# Altium PCB PCB1.PcbDoc
Units mil, origin at the board's own origin, x right, y up, seen from the top; angles counter-clockwise.
Board outline 3550 x 2100 mil, 2 copper layers (Top Layer, Bottom Layer); 81 components, 55 nets, 241 pads, 72 vias.
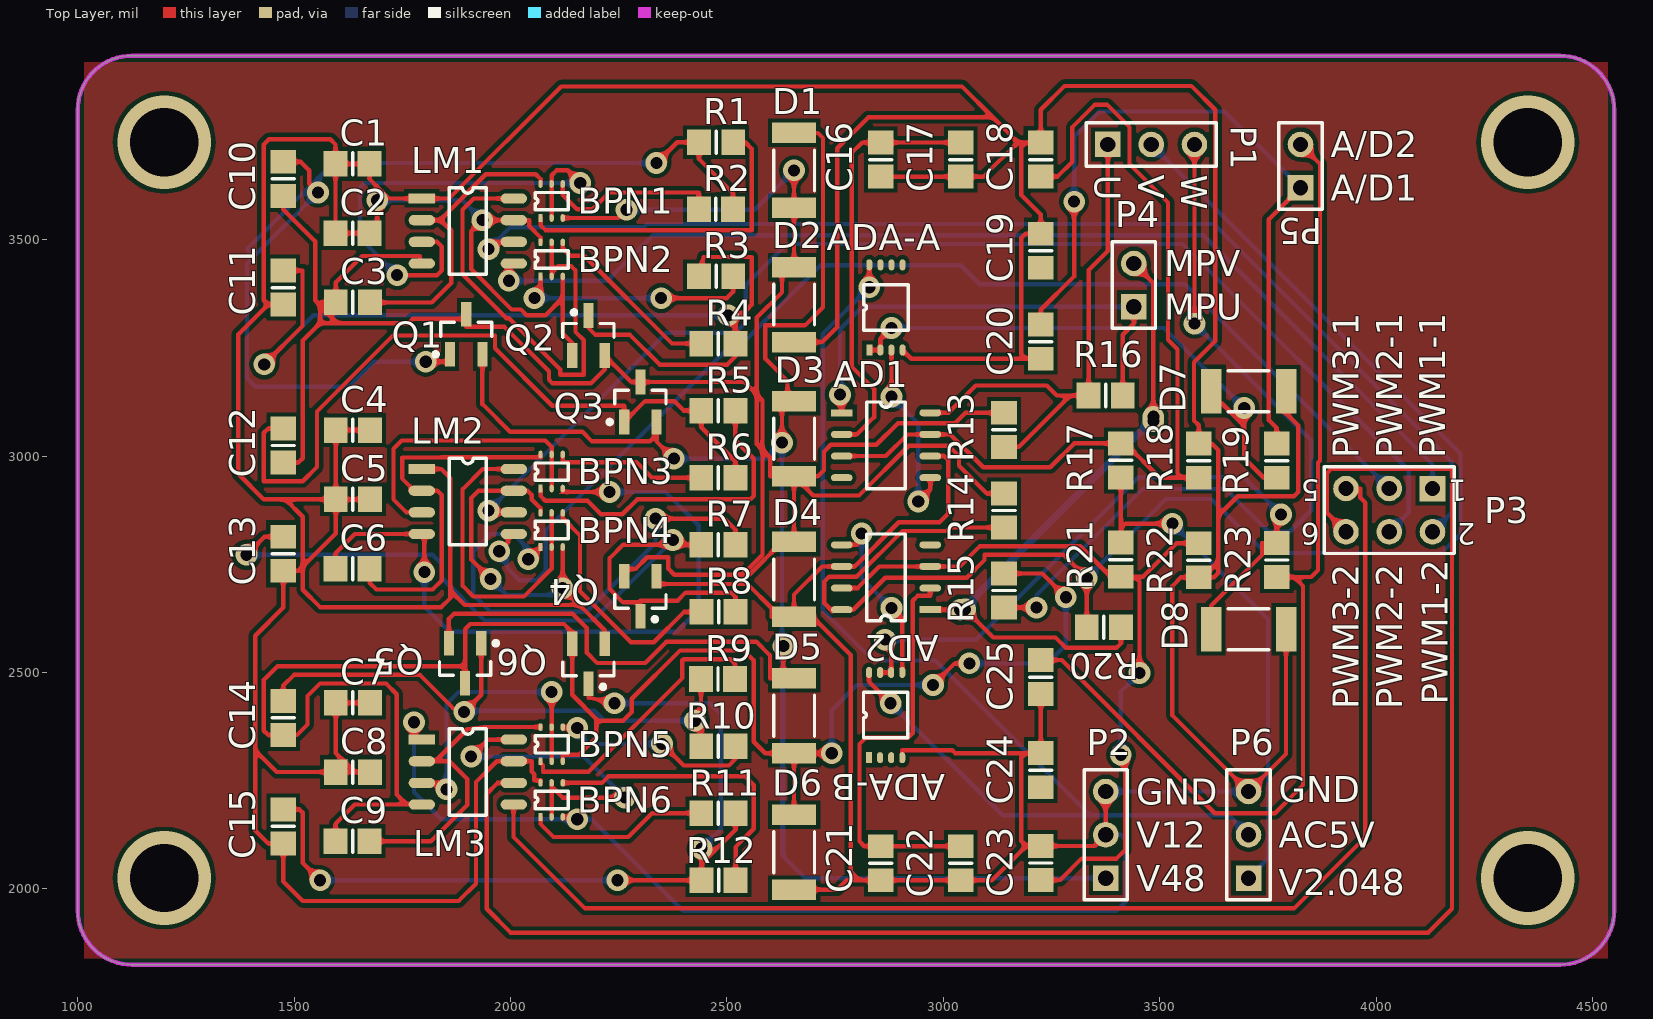
[diagram p0: Top Layer view]
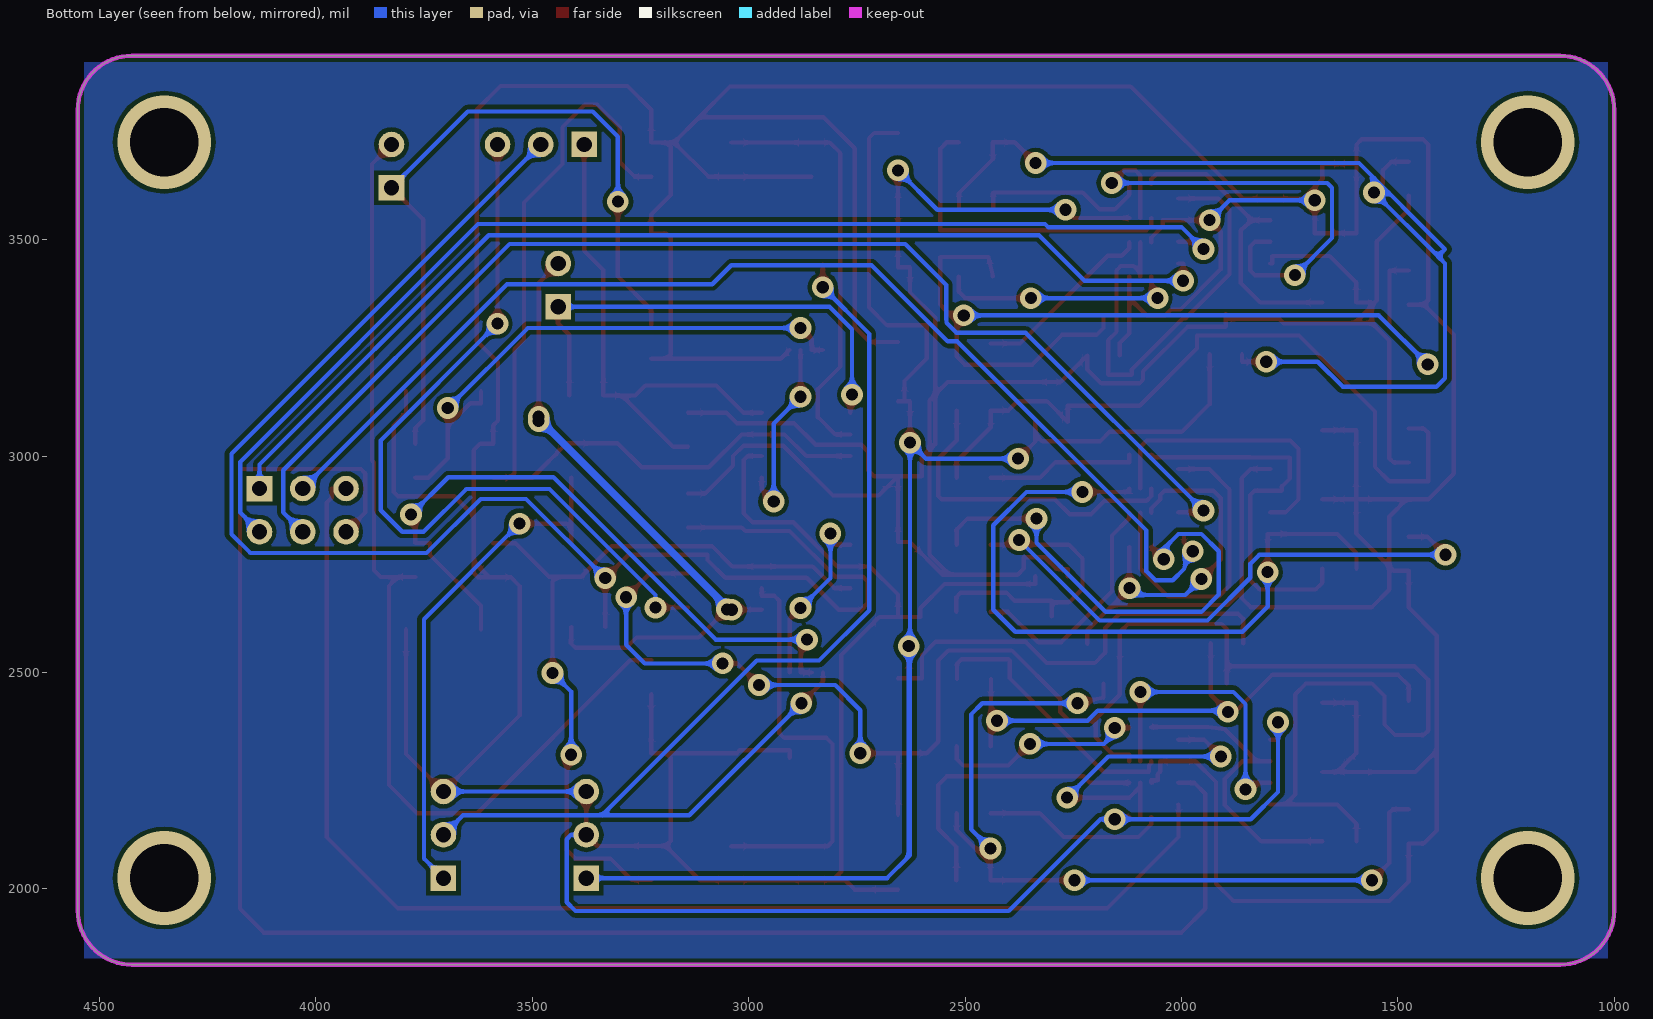
[diagram p1: Bottom Layer view, seen from below]

## Layer stack, top to bottom
Top Solder: solder mask 0.4, Solder Resist, Dk 3.5
Top Layer: signal copper 1.4
Dielectric 1: dielectric 12.6, FR-4, Dk 4.8
Bottom Layer: signal copper 1.4
Bottom Solder: solder mask 0.4, Solder Resist, Dk 3.5

## Board outline
1000,1950 1000,3800 cw(c1125,3800) 1125,3925 4425,3925 cw(c4425,3800) 4550,3800 4550,1950 cw(c4425,1950) 4425,1825 1125,1825 cw(c1125,1950)

## Design rules (kind name [scope] priority, off if disabled: settings)
Clearance [All] p1: gap=10
PolygonConnect [All] p1: connectstyle=Relief reliefconductorwidth=10 reliefentries=4 polygonreliefangle="90 Angle" airgapwidth=10
RoutingVias [All] p1: holewidth=28 width=50 viastyle="Through Hole" minholewidth=28 minwidth=50 maxholewidth=28 maxwidth=50
SolderMaskExpansion [All] p1: expansion=4
Width [All] p1: maxlimit=10 minlimit=10 preferedwidth=10
30 further rules are at their usual default settings.

## Classes and differential pairs
component class Sheet1: BC? BPN1 BPN2 BPN3 BPN4 BPN5 BPN6 C1 C2 C3 C4 C5 C6 C7 C8 C9 C10 C11 C12 C13 C14 C15 D1 D2 D3 D4 D5 D6 LM1 LM2 LM3 LM? P1 P2 P3 Q1 Q2 Q3 Q4 Q5 Q6 R1 R2 R3 R4 R5 R6 R7 R8 R9 R10 R11 R12 R13 R14 R15
component class Sheet2: AD1 AD2 ADA-A ADA-B C16 C17 C18 C19 C20 C21 C22 C23 C24 C25 D7 D8 P4 P5 P6 R16 R17 R18 R19 R20 R21 R22 R23

## Components (designator, comment, footprint, x,y, rotation, side; value= is the part's Value field where it differs from the comment)
AD1 "AD8210" AD8210 2765,3100 r0 top
AD2 "AD8210" AD8210 2969.72,2645 r180 top
ADA-A "Component_1" ADA4096 2828.82,3245 r90 top (schematic designator ADA-)
ADA-B "ADA-B" ADA4096 2828.23,2303.15 r90 top
BPN1 "BPN1" BC847BPN 2069.41,3550 r90 top
BPN2 "BPN2" BC847BPN 2069.41,3415 r90 top
BPN3 "BPN3" BC847BPN 2069.41,2925 r90 top
BPN4 "BPN4" BC847BPN 2069.41,2790 r90 top
BPN5 "BPN5" BC847BPN 2069.41,2295 r90 top
BPN6 "BPN6" BC847BPN 2069.41,2166.26 r90 top
C1 "Cap" 6-0805_M 1635,3675 r0 top
C2 "Cap" 6-0805_M 1635,3515 r0 top
C3 "Cap" 6-0805_M 1635.63,3355 r0 top
C4 "Cap" 6-0805_M 1635.63,3060 r0 top
C5 "Cap" 6-0805_M 1635.63,2900 r0 top
C6 "Cap" 6-0805_M 1635,2740 r0 top
C7 "Cap" 6-0805_M 1635.63,2430 r0 top
C8 "Cap" 6-0805_M 1635.63,2270 r0 top
C9 "Cap" 6-0805_M 1635,2110 r0 top
C10 "Cap" 6-0805_M 1475,3640.63 r90 top
C11 "Cap" 6-0805_M 1475,3389.37 r90 top
C12 "Cap" 6-0805_M 1475,3024.37 r90 top
C13 "Cap" 6-0805_M 1475,2774.37 r90 top
C14 "Cap" 6-0805_M 1475,2395 r90 top
C15 "Cap" 6-0805_M 1475,2144.37 r90 top
C16 "Cap" 6-0805_M 2855,3685 r90 top
C17 "Cap" 6-0805_M 3040,3685 r90 top
C18 "Cap" 6-0805_M 3225,3685 r90 top
C19 "Cap" 6-0805_M 3225,3474.37 r90 top
C20 "Cap" 6-0805_M 3225,3264.37 r90 top
C21 "Cap" 6-0805_M 2855,2059.37 r90 top
C22 "Cap" 6-0805_M 3040,2059.37 r90 top
C23 "Cap" 6-0805_M 3225,2060 r90 top
C24 "Cap" 6-0805_M 3225,2274.37 r90 top
C25 "Cap" 6-0805_M 3225,2489.37 r90 top
D1 "Diode 1N914" 12Z-2010 2655,3660 r90 top
D2 "Diode 1N914" 12Z-2010 2655,3350 r90 top
D3 "Diode 1N914" 12Z-2010 2655,3040 r90 top
D4 "Diode 1N914" 12Z-2010 2655,2715 r90 top
D5 "Diode 1N914" 12Z-2010 2655,2400 r90 top
D6 "Diode 1N914" 12Z-2010 2655,2085 r90 top
D7 "D Zener" 12Z-2010 3705,3150 r180 top
D8 "D Zener" 12Z-2010 3705,2600 r180 top
LM1 "LM1" LM5101A 1795,3595 r0 top
LM2 "LM2" LM5101A 1795,2970 r0 top
LM3 "LM3" LM5101A 1795,2345 r0 top
P1 "Header 3" HDR1X3 3380,3720 r0 top
P2 "Header 3" HDR1X3 3375,2025 r90 top
P3 "Header 3X2" HDR2X3 4130,2925 r180 top
P4 "Header 2" HDR1X2 3440,3345 r90 top
P5 "Header 2" HDR1X2 3825,3620 r90 top
P6 "Header 3" HDR1X3 3705,2025 r90 top
Q1 "NMOS-2" SOT-23_M 1897.6,3281.26 r90 top
Q2 "NMOS-2" SOT23_M 2180,3278.74 r90 top
Q3 "NMOS-2" SOT-23_M 2300,3125 r90 top
Q4 "NMOS-2" SOT23_M 2300,2676.26 r270 top
Q5 "NMOS-2" SOT-23_M 1895,2521.26 r270 top
Q6 "NMOS-2" SOT23_M 2180,2520 r270 top
R1 "Res1" 6-0805_M 2475,3725 r0 top
R2 "Res1" 6-0805_M 2474.37,3570 r0 top
R3 "Res1" 6-0805_M 2475,3415 r0 top
R4 "Res1" 6-0805_M 2480,3260 r0 top
R5 "Res1" 6-0805_M 2480,3105 r0 top
R6 "Res1" 6-0805_M 2480,2950 r0 top
R7 "Res1" 6-0805_M 2480,2795 r0 top
R8 "Res1" 6-0805_M 2480.63,2640 r0 top
R9 "Res1" 6-0805_M 2479.37,2485 r0 top
R10 "Res1" 6-0805_M 2480,2330 r180 top
R11 "Res1" 6-0805_M 2480,2175 r180 top
R12 "Res1" 6-0805_M 2480.63,2020 r180 top
R13 "Res1" 6-0805_M 3140,3060.63 r90 top
R14 "Res1" 6-0805_M 3140,2874.37 r90 top
R15 "Res1" 6-0805_M 3140,2689.37 r90 top
R16 "Res1" 6-0805_M 3375,3140 r0 top
R17 "Res1" 6-0805_M 3410,2990 r90 top
R18 "Res1" 6-0805_M 3590,2989.37 r90 top
R19 "Res1" 6-0805_M 3770,2989.37 r90 top
R20 "Res1" 6-0805_M 3370.63,2605 r0 top
R21 "Res1" 6-0805_M 3410,2760.63 r270 top
R22 "Res1" 6-0805_M 3590,2759.37 r270 top
R23 "Res1" 6-0805_M 3770,2760 r270 top

## Footprints (in the part's own frame and the unit in brackets; to place one, negate y for a bottom-side part, rotate by r counter-clockwise, add the part's x,y. Pads: shape width x height; smd on the part's side, far side on the other; paste and mask are expansions set on the pad)
6-0805_M [mm] "Chip Resistor, Body 2.0x1.2mm, IPC Low Density"
  rect 1.4x1.5 smd: 1(-1,0) 2(1,0)
  silkscreen extent 0,-0.65 0,0.65, body extent -1.07,-0.7 1.07,0.7, height 0.7
12Z-2010 [mm] "Chip Resistor, Body 5.0x2.5mm, IPC High Density"
  rect 1.2x2.6 smd: 1(-2.2,0) 2(2.2,0)
  silkscreen extent -1.2,-1.2 1.2,1.2, body extent -2.58,-1.33 2.58,1.33, height 0.9
AD8210 [mm]
  rect 1.27x0.41 smd: 1(0,0)
  oval 1.27x0.41 smd: 2(0,-1.27) 3(0,-2.54) 4(0,-3.81) 5(5.2,-3.81) 6(5.2,-2.54) 7(5.2,-1.27) 8(5.2,0)
  silkscreen extent 1.47,-4.44 3.73,0.64
ADA4096 [mm]
  rect 0.65x0.35 smd: 1(0,0)
  oval 0.65x0.35 smd: 2(0,-0.65) 3(0,-1.3) 4(0,-1.95) 5(5,-1.95) 6(5,-1.3) 7(5,-0.65) 8(5,0)
  silkscreen extent 1.16,-2.28 3.84,0.33
BC847BPN [mm]
  rect 0.45x0.25 smd: 1(0,0)
  oval 0.45x0.25 smd: 2(0,-0.65) 3(0,-1.3) 4(2,-1.3) 5(2,-0.65) 6(2,0)
  silkscreen extent 0.48,-1.63 1.5,0.33
HDR1X2 [mm] "Connector; Header; 2 Position"
  rect 1.5x1.5 hole 0.9: 1(0,0)
  round 1.5 hole 0.9: 2(2.54,0)
  silkscreen extent -1.27,-1.27 3.81,1.27
HDR1X3 [mm] "Connector; Header; 3 Position"
  rect 1.5x1.5 hole 0.9: 1(0,0)
  round 1.5 hole 0.9: 2(2.54,0) 3(5.08,0)
  silkscreen extent -1.27,-1.27 6.35,1.27
HDR2X3 [mm] "Connector; Header; 3x2 Position"
  rect 1.5x1.5 hole 0.9: 1(0,0)
  round 1.5 hole 0.9: 2(0,2.54) 3(2.54,0) 4(2.54,2.54) 5(5.08,0) 6(5.08,2.54)
  silkscreen extent -1.27,-1.27 6.35,3.81
LM5101A [mm]
  rect 1.55x0.6 smd: 1(0,0)
  oval 1.55x0.6 smd: 2(0,-1.27) 3(0,-2.54) 4(0,-3.81) 5(5.4,-3.81) 6(5.4,-2.54) 7(5.4,-1.27) 8(5.4,0)
  silkscreen extent 1.61,-4.44 3.79,0.64
SOT23_M [mm] "SOT23, 3-Leads, Body 2.9x1.3mm, Pitch 0.95mm, Lead Span 2.3mm - Reverse Pinning, IPC Low Density"
  rect 1.45x0.6 smd: 1(1.175,0) 2(-1.175,-0.95) 3(-1.175,0.95)
  silkscreen extent -0.1,-1.5 1.47,1.5, body extent -0.7,-1.5 0.7,1.5, height 1.1
SOT-23_M [mm] "SOT23, 3-Leads, Body 2.9x1.3mm, Pitch 0.95mm, Lead Span 2.5mm, IPC Low Density"
  rect 1.45x0.6 smd: 1(-1.175,0.95) 2(-1.175,-0.95) 3(1.175,0)
  silkscreen extent -1.3,-1.5 0.7,1.92, body extent -0.7,-1.5 0.7,1.5, height 1.1

## Part data
AD1 AD2 ADA-B: library part Component_1
BPN1 BPN2 BPN3 BPN4 BPN5 BPN6: library part BC847BPN
C1 C2 C3 C4 C5 C6 C7 C8 C9 C10 C11 C12 C13 C14 C15 C16 C17 C18 C19 C20 C21 C22 C23 C24 C25: "Capacitor"
D1 D2 D3 D4 D5 D6: "High Conductance Fast Diode"
D7 D8: "Zener Diode"
LM1 LM2 LM3: library part LM5101A
P1 P2 P6: "Header, 3-Pin"
P3: "Header, 3-Pin, Dual row"
P4 P5: "Header, 2-Pin"
Q1 Q2 Q3 Q4 Q5 Q6: "N-Channel Power MOSFET"
R1 R2 R3 R4 R5 R6 R7 R8 R9 R10 R11 R12 R13 R14 R15 R16 R17 R18 R19 R20 R21 R22 R23: "Resistor"

## Via types
v1: diameter 50, hole 28, Top Layer to Bottom Layer, 68 vias
v2: diameter 216.54, hole 157.48, Top Layer to Bottom Layer, 4 vias

## Nets (pads, with @x,y where several pads share a name; then routed paths per layer and width w, separated by ;. In a path a pad name is that pad's centre, name@x,y a point inside that pad or via, vN(x,y) a via of type N, cw(c..) or ccw(c..) an arc to the next point about the centre after c; other vN are vias at no path point)
A/D1: C20.2 P5.1 R19.2 | length 1715
  Top Layer w10: C20.2 3225,3338 3302,3415 v1(3302,3588) ; R19.2 3770,3065 3752,3083 3752,3547 P5.1
  Bottom Layer w10: v1(3302,3588) 3302,3738 3360,3796 3649,3796 P5.1
A/D2: C25.2 P5.2 R23.2 | length 2374.9
  Top Layer w10: C25.2 3273.26,2528.74 3627,2175 3766,2175 3831,2240 3831,2700 3810.37,2720.63 ; R23.2 3810.37,2720.63 ; P5.2 3870,3675 3870,2989.53 3865.47,2985 3865.47,2736.1 3850,2720.63 3810.37,2720.63
ACV5: ADA-A.8 ADA-B.8 P6.2 | length 2701.1
  Top Layer w10: ADA-B.8 2828.23,2478.77 v1(2878,2429) ; v1(2828.82,3390) ADA-A.8
  Bottom Layer w10: v1(2828.82,3390) 2721,3282.18 2721,2644 2837.37,2527.63 2981.05,2527.63 3338.68,2170 ; v1(2878,2429) 3137,2170 3338.68,2170 ; P6.2 3660,2170 3338.68,2170
GND: AD1.6 AD2.6 ADA-A.4 ADA-B.4 BPN2.3 BPN2.6 BPN4.3 BPN4.6 BPN6.3 BPN6.6 C1.1 C1.2 C2.1 C2.2 C4.1 C4.2 C5.1 C5.2 C7.1 C7.2 C8.1 C8.2 C11.1 C13.1 C15.1 C16.1 C17.1 C18.2 C19.2 C20.1 C21.1 C22.1 C23.2 C24.2 C25.1 D2.1 D4.1 D6.1 D7.1 D8.1 LM1.1 LM1.7 LM2.1 LM2.7 LM3.1 LM3.7 P2.2 P2.3 P6.3 Q2.3 Q4.3 Q6.3 R18.2 R22.2 | length 20764.7
  Top Layer w10: C11.1 1440,3350 ; C8.2 1640,2270 ; C7.2 C7.1 1596.26,2313.74 1640,2270 ; C5.2 C5.1 ; C4.2 C4.1 C5.1 ; v1(1692,3591) 1692,3515 C2.2 C2.1 C1.1 ; v1(1777,2385) 1777,2345 LM3.1 ; LM2.1 1840,2970 1861,2949 1861,2688.79 ; v1(1954,2716) 1909,2761 1909,2903 1926,2920 LM2.7 2039,2920 2049,2910 2049,2899.71 2069.41,2879.3 BPN4.6 ; BPN6.6 2069.41,2251 2055,2251 2055,2265 2049,2271 2049,2295 LM3.7 1968,2295 1920,2247 1920,2012 1880,1972 1520,1972 1475,2017 C15.1 1440,2105 1410,2135 1410,2320 ; BPN2.6 2069.41,3505 2043,3531.41 2043,3545 LM1.7 v1(1935,3545) 1909,3519 1909,3432 2002.45,3338.55 2023.95,3338.55 2037.5,3325 2080,3325 2120.59,3365.59 ; BPN6.3 2148.74,2166.26 v1(2154,2161) ; BPN2.3 2120.59,3365.59 ; Q2.3 2142.6,3261.46 2120.59,3283.46 2120.59,3365.59 ; Q6.3 2217.4,2597.6 2159.21,2655.79 ; Q4.3 2337.4,2704.53 2547.47,2704.53 2603.61,2648.39 2603.61,2628.39 D4.1 ; D6.1 2755,1998.39 2776.61,2020 2806,2020 ; D2.1 2720,3263.39 2755,3298.39 2755,3711 2827,3783 3114,3783 ; C16.1 C17.1 3093,3645.63 3172.63,3724.37 ; ADA-B.4 2905,2320.2 3020.26,2320.2 3026.72,2313.74 3190,2313.74 ; ADA-A.4 2925.59,3225 3190,3225 ; AD1.6 3002,3000 3011.11,2990.89 3011.11,2867.19 2990.84,2846.93 2897.07,2846.93 2795.14,2745 AD2.6 2720,2745 2655,2680 D4.1 ; C25.1 C24.2 3190,2313.74 ; C20.1 3190,3225 ; P2.3 P2.2 3349.37,2099.37 C23.2 3191.37,2099.37 ; D8.1 3791.61,2311.61 P6.3 3529,2401 3529,2700 3549,2720 R22.2 R22.2@3599,2720 ; D7.1 3791.61,3099 3820,3070.61 3820,2917 3810,2907 3680,2907 3635,2862 ; 1410,2320 1410,2585 1475,2650 C13.1 1510,2735 1520,2745 ; 1410,2320 1460,2270 C8.1 1640,2270 ; 1440,3350 1371,3281 1371,2959 1430,2900 1480,2900 ; 1440,3350 1430,3360 1430,3720 1442,3732 1583.63,3732 1595.63,3720 C1.1 ; 1480,2900 C5.1 ; 1480,2900 1520,2860 1520,2745 ; 1520,2745 1520,2691 1560,2651 1840,2651 1861,2672 1861,2688.79 ; 1520,2745 1596.26,2821.26 C5.1 ; C1.1 C1.2 1674.37,3640 1719.37,3595 LM1.1 1858,3595 2117,3854 3043,3854 3114,3783 ; 1861,2688.79 1894,2655.79 2159.21,2655.79 ; v1(2120,2695) 2159.21,2655.79 ; v1(2120,2695) BPN4.3 2120.59,2695.59 v1(2120,2695) ; D4.1 2698,2628.39 2786,2540.39 2786,2040 2806,2020 ; 2806,2020 C21.1 C22.1 3112,2020 3191.37,2099.37 ; 3114,3783 3172.63,3724.37 ; 3172.63,3724.37 3190,3724.37 ; 3190,2313.74 3180,2303.74 3180,2110.74 3191.37,2099.37 ; 3190,3225 3180,3235 3180,3503.74 3190,3513.74 C19.2 3225,3558 3180,3603 3180,3714.37 3190,3724.37 ; 3190,3724.37 C18.2 3225,3800 3280,3855 3573,3855 3628,3800 3628,3266 3579,3217 3579,3082 3590,3071 R18.2 3620,3028.74 3635,3013.74 3635,2862 ; R22.2@3599,2720 3625,2720 3635,2730 3635,2756 ; R22.2@3599,2720 3635,2756 ; 3635,2756 3635,2862
  Bottom Layer w10: v1(1692,3591) 1889,3591 v1(1935,3545) ; v1(1777,2385) 1777,2224 1840,2161 v1(2154,2161) 2187,2161 2399,1949 3400,1949 3420,1969 3420,2115 3410,2125 P2.2 ; v1(1954,2716) 1991,2679 2104,2679 v1(2120,2695) ; P2.3 P6.3
HB1: BPN1.6 C3.2 LM1.2 | length 697.7
  Top Layer w10: C3.2 1818,3355 1863,3400 1863,3522 1836.71,3545 ; LM1.2 1836.71,3545 ; BPN1.6 2069.41,3640 2058.41,3651 1942.71,3651 1836.71,3545
HB2: BPN3.6 C6.2 LM2.2 | length 899.8
  Top Layer w10: C6.2 1674.37,2707.49 1690,2691.86 1820,2691.86 1841,2712.86 1841,2910 1831,2920 LM2.2 1768,2920 1768,2930 1749.49,2948.51 1749.49,2996.81 1840.32,2996.81 1840.51,2997 2069.41,2997 BPN3.6
HB3: BPN5.6 C9.2 LM3.2 | length 717.1
  Top Layer w10: C9.2 1816,2110 1900,2194 1900,2254.06 1859.06,2295 1826,2295 ; LM3.2 1826,2295 ; BPN5.6 2069.41,2374 1938,2374 1900,2369 1826,2295
HI1: LM1.5 P3.1 | length 2504
  Top Layer w10: v1(1996,3405) 1996,3445 LM1.5
  Bottom Layer w10: v1(1996,3405) 2224,3405 2329,3510 3600.56,3510 4130,2980.56 P3.1
HI2: LM2.5 P3.3 | length 2730.9
  Top Layer w10: v1(1974,2780) 1994,2800 1994,2820 LM2.5
  Bottom Layer w10: v1(1974,2780) 1984,2780 1994,2739.14 2020,2713.14 2060,2713.14 2081,2734.14 2081,2828 2518,3265 2540,3265 2716,3441 3040,3441 3084,3397 3558,3397 P3.3
HI3: LM3.5 P3.5 | length 3023.3
  Top Layer w10: LM3.5 2007,2195 2007,2120 2172,1955 3810,1955 3975,2120 3975,2892 3963,2904 3963,2925 P3.5
HO1: BPN1.2 BPN1.5 LM1.3 | length 1145.9
  Top Layer w10: v1(1738,3418) 1830,3418 1841,3429 1841,3484 1830,3495 LM1.3 ; BPN1.2 BPN1.5 2095,3649 2106,3660 2132,3660 v1(2161,3631)
  Bottom Layer w10: v1(1738,3418) 1652,3504 1652,3620 1663,3631 v1(2161,3631)
HO2: BPN3.2 BPN3.5 LM2.3 | length 670.4
  Top Layer w10: LM2.3 1759.49,2870 1729.49,2900 1729.49,3016.81 1748.68,3036 2080,3036 2095,3021 BPN3.5 BPN3.2
HO3: BPN5.2 BPN5.5 LM3.3 | length 674.8
  Top Layer w10: LM3.3 1837,2245 v1(1852,2230) ; BPN5.2 BPN5.5 v1(2095,2455)
  Bottom Layer w10: v1(1852,2230) 1852,2427 1880,2455 v1(2095,2455)
HS1: BPN1.3 C3.1 C10.1 C12.1 D1.1 D2.2 D3.1 D4.2 LM1.4 Q1.3 Q2.2 Q3.3 Q4.2 R13.2 R14.2 | length 5948
  Top Layer w10: C12.1 1510,2985 1520,2995 1520,3267 1560,3307 ; C10.1 1475,3570.02 1549,3496.02 1549,3360 1560,3348.34 ; LM1.4 1790.31,3445 1790.31,3462.41 1657.41,3462.41 1596.26,3401.26 C3.1 1560,3355 1560,3348.34 ; Q1.3 Q1.3@1897.6,3317 ; BPN1.3 2249,3550 v1(2268,3569) ; Q4.2 2262.6,2739 2289,2739 2316.06,2766.06 2364.21,2766.06 2364.21,2740 2378.21,2726 2536,2726 ; v1(2655,3660) D1.1 D2.2 2627,3436.61 2627,3378.18 2568.82,3320 2568.82,3142.18 ; R14.2 3100,2913.74 3036,2977.74 3036,3000 3012,3024 2920,3024 2805,2909 2699.39,2909 D3.1 ; R13.2 3051,3100 3027,3076 2895,3076 2845,3026 2740,3026 2724,3010 2724,2967.39 2710,2953.39 D3.1 ; 1560,3307 1560,3348.34 ; 1560,3307 1599,3307 ; 1560,3348.34 1573.75,3333.76 1599,3307 ; 1599,3307 1764,3307 1774,3317 Q1.3@1897.6,3317 ; Q1.3@1897.6,3317 1897.6,3298.55 1986.08,3298.55 2088.75,3195.88 2088.75,3176.25 2097,3168 2185.4,3168 2217.4,3200 Q2.2 2278.62,3171.26 Q3.3 2300,3171 2540,3171 2568.82,3142.18 ; 2536,2726 2551.39,2726 2627,2801.61 D4.2 D3.1 ; 2536,2726 2581.93,2771.93 2581.93,3014.53 ; 2568.82,3142.18 2581.93,3129.07 2581.93,3014.53 ; 2568.82,3142.18 2568.82,3027.64 2581.93,3014.53 ; 2581.93,3014.53 2600,2996.46 2600,2953.39 D3.1
  Bottom Layer w10: v1(2268,3569) 2564,3569 v1(2655,3660)
HS2: BPN3.3 C6.1 LM2.4 | length 1655.8
  Top Layer w10: C6.1 1595.63,2775.63 1640,2820 LM2.4 1801,2820 v1(1801,2732) ; BPN3.3 2120.59,2917 v1(2229,2917)
  Bottom Layer w10: v1(1801,2732) 1801,2652 1859,2594 2384,2594 2435,2645 2435,2840 2358,2917 v1(2229,2917)
HS3: BPN5.3 C9.1 C14.1 D5.1 D6.2 LM3.4 Q5.3 Q6.2 R15.2 | length 4245.9
  Top Layer w10: C9.1 1595.63,2150.63 1640,2195 1760,2195 ; LM3.4 1760,2195 ; Q5.3 1895,2514.53 ; BPN5.3 2120.59,2310 2158.12,2310 2198.2,2350.08 2198.2,2388.65 ; D6.2 D5.1 ; v1(2742,2313.39) D5.1 ; v1(2976,2471) 3026,2521 v1(3060,2521) ; R15.2 3228.26,2728.74 v1(3283,2674) ; 1760,2195 1737,2218 1737,2450 1712.47,2474.53 1560,2474.53 1531,2445.53 1531,2380 1506.63,2355.63 C14.1 1440,2355.63 1430,2365.63 1430,2483 1461.53,2514.53 1895,2514.53 ; 1895,2514.53 1895,2600 1907,2612 2123.33,2612 2142.6,2592.73 Q6.2 2142.6,2448.4 2198.2,2392.8 2198.2,2388.65 ; 2198.2,2388.65 2260,2388.65 2280,2408.65 2280,2439.29 2391.71,2551 2539,2551 2562,2528 2562,2340 2588.61,2313.39 D5.1
  Bottom Layer w10: v1(2742,2313.39) 2742,2413 2800,2471 v1(2976,2471) ; v1(3060,2521) 3240,2521 3283,2564 v1(3283,2674)
LI1: LM1.6 P3.2 | length 2722.7
  Top Layer w10: v1(1949,3478) 1966,3495 LM1.6
  Bottom Layer w10: v1(1949,3478) 2000,3529 2308.08,3529 2315.08,3536 3625,3536 4174.53,2986.47 4174.53,2869.53 P3.2
LI2: LM2.6 P3.4 | length 2869.8
  Top Layer w10: v1(1949,2874) 1953,2870 LM2.6
  Bottom Layer w10: v1(1949,2874) 2360,3285 2520,3285 2542.88,3307.88 2542.88,3314.89 2543.31,3315.32 2543.31,3395.31 2638,3490 3552.22,3490 4075,2967.22 4075,2870 P3.4
LI3: LM3.6 P3.6 | length 4077.6
  Top Layer w10: LM3.6 1970,2245 1945,2220 1945,1954 2000,1899 4120,1899 4175,1954 4175,2970 3895.47,2970 3885.47,2960 3885.47,2869.53 P3.6
LO1: BPN2.2 BPN2.5 LM1.8 | length 1055
  Top Layer w10: LM1.8 1915,3595 1889,3569 1889,3420 1990.45,3318.55 1996.45,3318.55 2115,3200 2115,3188 2169.41,3188 2169.41,3267.59 2150,3287 2150,3429 2140,3439 2110,3439 2095,3424 ; BPN2.2 2095,3424 ; BPN2.5 2095,3424
LO2: BPN4.2 BPN4.5 LM2.8 | length 732
  Top Layer w10: LM2.8 1936,2970 1889,2923 1889,2700.79 1914,2675.79 2030.79,2675.79 2095,2740 BPN4.2 BPN4.5
LO3: BPN6.2 BPN6.5 LM3.8 | length 767.2
  Top Layer w10: v1(1909,2306) 1948,2345 LM3.8 ; BPN6.2 2095,2236 ; BPN6.5 2095,2236 ; v1(2264,2211) 2120,2211 2095,2236
  Bottom Layer w10: v1(1909,2306) 2169,2306 v1(2264,2211)
MPU: AD1.1 P4.1 R16.2 | length 1110.8
  Top Layer w10: v1(2761,3142) 2765,3138 AD1.1 ; R16.2 3414.37,3280.47 3440,3306.1 P4.1
  Bottom Layer w10: v1(2761,3142) 2761,3293 2813,3345 P4.1
MPV: AD2.1 P4.2 R20.2 | length 2136.8
  Top Layer w10: AD2.1 v1(3039,2645) ; v1(3050,2646) 3115,2581 3259,2581 3283,2557 3400,2557 3410,2567 R20.2 ; P4.2 3485,3400 v1(3485,3091) v1(3485,3081)
  Bottom Layer w10: v1(3039,2645) v1(3485,3091) ; v1(3050,2646) v1(3485,3081)
NetAD1_2: AD1.2 C16.2 C17.2 | length 985.2
  Top Layer w10: AD1.2 2800,3050 2840,3090 2840,3155 2788,3207 2788,3700 2812.37,3724.37 C16.2 C17.2
NetAD1_3: AD1.3 AD1.7 C18.1 R17.2 R18.1 | length 2135.4
  Top Layer w10: AD1.3 2867,3000 2917,3050 AD1.7 3016,3050 3092,2974 3247,2974 3302.37,3029.37 R17.2 3420.63,3029.37 3500,2950 3551,2950 ; C18.1 3263.63,3645.63 3298,3680 3298,3760 3350,3812 3378,3812 3430,3760 3430,3675 3519,3586 3519,3269 3541,3247 3541,2960 3551,2950 ; R18.1 3551,2950
NetAD1_5: AD1.5 ADA-A.3 | length 442.6
  Top Layer w10: v1(2880,3137) ADA-A.3 ; v1(2942,2895) 2970,2923 2970,2950 AD1.5
  Bottom Layer w10: v1(2880,3137) 2942,3075 v1(2942,2895)
NetAD2_2: AD2.2 C21.2 C22.2 | length 966.3
  Top Layer w10: AD2.2 2969.72,2677 2940,2677 2929,2666 2929,2360 2918,2349 2820,2349 2806,2335 2806,2110 2817.26,2098.74 C21.2 C22.2
NetAD2_3: AD2.3 AD2.7 C23.1 R21.2 R22.1 | length 1808.2
  Top Layer w10: AD2.7 2801.87,2695 2851.87,2745 AD2.3 3037.74,2745 3084.74,2792 3316,2792 3386.74,2721.26 R21.2 3441.74,2721.26 ; C23.1 3270,2020.63 3319.37,2070 3400,2070 3420,2090 3420,2300 v1(3410,2310) ; v1(3453,2499) 3453,2710 3441.74,2721.26 ; R22.1 3538.48,2798.74 3461,2721.26 3441.74,2721.26
  Bottom Layer w10: v1(3410,2310) 3410,2456 v1(3453,2499)
NetAD2_5: AD2.5 ADA-B.5 | length 425.5
  Top Layer w10: AD2.5 2800,2795 2811,2806 v1(2811,2821) ; v1(2880,2649) 2905,2624 ADA-B.5
  Bottom Layer w10: v1(2811,2821) 2811,2718 v1(2880,2649)
NetADA-_1: ADA-A.1 ADA-A.2 D7.2 R19.1 | length 1314.5
  Top Layer w10: ADA-A.1 ADA-A.2 2854.41,3270.41 v1(2880,3296) ; D7.2 3618.39,3122 3643.19,3122 3695,3070.19 ; v1(3695,3111) 3695,3070.19 ; R19.1 3740,2950 3695,2995 3695,3070.19
  Bottom Layer w10: v1(2880,3296) 3510,3296 v1(3695,3111)
NetADA-B_6: ADA-B.6 ADA-B.7 D8.2 R23.1 | length 1565.4
  Top Layer w10: ADA-B.7 ADA-B.6 2879.41,2561.59 v1(2865,2576) ; D8.2 3618.39,2654 3736,2771.61 3736,2799.37 R23.1 3770,2855 v1(3780,2865)
  Bottom Layer w10: v1(2865,2576) 3076,2576 3451,2951 3694,2951 v1(3780,2865)
NetBPN1_1: BPN1.1 R1.2 | length 745.8
  Top Layer w10: BPN1.1 2069.41,3533.29 2080.7,3522 2557,3522 2557,3710 2542,3725 R1.2
NetBPN1_4: BPN1.4 R2.1 | length 408.8
  Top Layer w10: BPN1.4 2120.59,3603.41 2154,3570 2188.98,3570 2228,3609.02 2435,3609.02 R2.1
NetBPN2_1: BPN2.1 R3.2 | length 556.6
  Top Layer w10: v1(2055,3365) 2069.41,3379.41 BPN2.1 ; v1(2348,3365) 2499.37,3365 2514.37,3380 R3.2
  Bottom Layer w10: v1(2055,3365) v1(2348,3365)
NetBPN2_4: BPN2.4 R4.1 | length 424.9
  Top Layer w10: BPN2.4 2120.59,3480 2137.89,3462.7 2170.13,3462.7 2372.83,3260 R4.1
NetBPN3_1: BPN3.1 R5.2 | length 759.6
  Top Layer w10: BPN3.1 2069.41,2907.59 2080,2897 2177.7,2897 2209.15,2865.55 2258.15,2865.55 2292.6,2900 2554,2900 2561.93,2907.93 2561.93,2994.07 2519.37,3036.63 R5.2
NetBPN3_4: BPN3.4 R6.1 | length 352.7
  Top Layer w10: BPN3.4 2120.59,2986 2291,2986 2327,2950 R6.1
NetBPN4_1: BPN4.1 R7.2 | length 1112
  Top Layer w10: v1(2041,2761.59) BPN4.1 ; v1(2335,2855.56) 2494.44,2855.56 2519.37,2830.63 R7.2
  Bottom Layer w10: v1(2041,2761.59) 2041,2786 2007,2820 1954,2820 1914,2780 1914,2680 1954,2640 2175,2640 2335,2800 v1(2335,2855.56)
NetBPN4_4: BPN4.4 R8.1 | length 556.2
  Top Layer w10: BPN4.4 2120.59,2856.47 2160.49,2816.57 2160.49,2687.51 2278,2570 2330.73,2570 2400.73,2640 R8.1
NetBPN5_1: BPN5.1 R9.2 | length 641.1
  Top Layer w10: BPN5.1 2069.41,2291 2075,2285.41 2075,2271 2180.57,2271 2397,2487.43 2397,2528 2400,2531 2507.74,2531 2518.74,2520 R9.2
NetBPN5_4: BPN5.4 R10.1 | length 479.8
  Top Layer w10: BPN5.4 2120.59,2372 v1(2154,2372) ; v1(2350,2335) 2400,2285 2504.37,2285 2519.37,2300 R10.1
  Bottom Layer w10: v1(2154,2372) 2154,2360 2179,2335 v1(2350,2335)
NetBPN6_1: BPN6.1 R11.2 | length 422.7
  Top Layer w10: BPN6.1 2069.41,2150 2099.39,2120.02 2272.02,2120.02 2327,2175 R11.2
NetBPN6_4: BPN6.4 R12.1 | length 693.3
  Top Layer w10: BPN6.4 2211,2245 2226,2260 2542,2260 2562,2240 2562,2139 2520,2097 R12.1
NetC10_2: C10.2 Q1.1 R1.1 R2.2 | length 2500.6
  Top Layer w10: C10.2 1515,3680 1535,3660 1535,3629 v1(1555,3609) ; v1(1804,3218) 1860.2,3218 Q1.1 ; v1(2337,3677) 2385,3725 R1.1 2435.63,3686.11 2513.74,3608 R2.2
  Bottom Layer w10: v1(1555,3609) 1407.5,3461.5 ; v1(1804,3218) 1685,3218 1627,3160 1411,3160 1391,3180 1391,3445 1407.5,3461.5 ; v1(2337,3677) 1590,3677 1391,3478 1407.5,3461.5
NetC11_2: C11.2 Q2.1 R3.1 R4.2 | length 2253.4
  Top Layer w10: v1(1431,3212) 1519.53,3300.53 1519.53,3428.74 C11.2 ; Q2.1 2180,3296.02 2196.02,3280 2276,3280 2345,3211 2500.37,3211 2519.37,3230 R4.2 v1@2519.37,3308.63 ; R3.1 2445.63,3460 2557,3460 2557,3350 2520.11,3309.44 v1@2519.37,3308.63 ; v1(2503,3325) v1@2519.37,3308.63
  Bottom Layer w10: v1(1431,3212) 1544,3325 v1(2503,3325)
NetC12_2: C12.2 Q3.1 R5.1 R6.2 | length 1724.8
  Top Layer w10: C12.2 1440,3063.74 1430,3053.74 1430,2942 1520,2942 1553,2975 1553,3103 1728.55,3278.55 1963.95,3278.55 1963.95,3248.98 2096.52,3116.4 2262.6,3116.4 Q3.1 2310.86,3127 2378,3127 2400,3105 R5.1 2440.63,3066.74 2519.37,2988 R6.2
NetC13_2: C13.2 Q4.1 R7.1 R8.2 | length 1943.7
  Top Layer w10: v1(1390,2772) 1431.74,2813.74 C13.2 ; Q4.1 2300,2662 ; v1(2375,2806) v1@2386,2795 ; R7.1 v1@2386,2795 ; R8.2 2520,2674.53 2510,2684.53 2404.53,2684.53 2386,2666 2300,2666 2300,2662 ; 2300,2662 2260,2662 2228.7,2693.3 2228.7,2763.7 2260,2795 v1@2386,2795
  Bottom Layer w10: v1(1390,2772) 1820,2772 1841,2751 1841,2718.74 1939.74,2620 2189,2620 v1(2375,2806)
NetC14_2: C14.2 Q5.1 R9.1 R10.2 | length 1392
  Top Layer w10: C14.2 1475,2470 1499.53,2494.53 1790.47,2494.53 1868,2417 v1(1892.76,2409) 1932.4,2448.65 Q5.1 ; v1(2426,2388.65) v1@2440.63,2374.02 ; R9.1 2440,2407.63 2440.63,2407 v1@2440.63,2374.02 ; R10.2 v1@2440.63,2374.02
  Bottom Layer w10: v1(1892.76,2409) 1895.76,2412 2193.51,2412 2216.87,2388.65 v1(2426,2388.65)
NetC15_2: C15.2 Q6.1 R11.1 R12.2 | length 2002.7
  Top Layer w10: C15.2 1512.04,2183.74 1520,2175.78 1520,2060 v1(1560,2020) ; Q6.1 2180,2442 v1(2240,2429) ; v1(2247,2020) R12.2 2441.26,2058 ; v1(2441.26,2093.26) 2441.26,2058 ; R11.1 2519.37,2136.11 2441.26,2058
  Bottom Layer w10: v1(1560,2020) v1(2247,2020) ; v1(2240,2429) 2460,2429 2486,2403 2486,2138 v1(2441.26,2093.26)
U: AD1.8 P1.1 R13.1 R16.1 | length 1202.1
  Top Layer w10: AD1.8 3012,3100 3075,3163 3239,3163 3262,3140 3293,3140 ; R13.1 3174.26,3021.26 3293,3140 ; P1.1 3380,3474.37 3335.63,3430 R16.1 3293,3140
V: AD2.8 P1.2 R14.1 R20.1 | length 3529.6
  Top Layer w10: R14.1 3016.07,2835 3008,2826.93 2905.5,2826.93 2799.57,2721 2736,2721 2725,2710 2725,2660 2740,2645 AD2.8 2791.87,2645 2865.87,2719 3054,2719 3095,2760 3095,2772 3277.26,2772 v1(3331.26,2718) R20.1
  Bottom Layer w10: v1(3331.26,2718) 3514.26,2901 3619,2901 3744,2776 4151,2776 4194.53,2819.53 4194.53,3005.47 P1.2
V2.048: P6.1 R17.1 R21.1 | length 1203
  Top Layer w10: R21.1 3410,2834 ; R17.1 3410,2834 ; v1(3529,2844) 3420,2844 3410,2834
  Bottom Layer w10: v1(3529,2844) 3750,2623 3750,2070 P6.1
V48: D1.2 D3.2 D5.2 P2.1 Q1.2 Q3.2 Q5.2 | length 5168.2
  Top Layer w10: Q5.2 1857.6,2624.09 1869.3,2635.79 2143.21,2635.79 2176,2603 2176,2546 2200,2522 2311.02,2522 2360.02,2571 2568,2571 2599.39,2539.61 2599.39,2486.61 D5.2@2630,2486.61 ; Q1.2 1935,3120 1999,3056 2166,3056 2188,3034 2321.4,3034 2337.4,3050 ; Q3.2 2337.4,3050 ; v1(2377.4,2994) 2337.4,3034 2337.4,3050 ; v1(2627,3031) 2627,3126.61 D3.2@2640,3126.61 ; v1(2630,2561) D5.2@2630,2486.61 ; D5.2 D5.2@2630,2486.61 ; D3.2 D3.2@2640,3126.61 ; D1.2 2710,3746.61 2722,3734.61 2722,3344.01 2680,3302.01 2588.82,3302.01 2588.82,3224.76 2640,3173.58 D3.2@2640,3126.61
  Bottom Layer w10: v1(2377.4,2994) 2590,2994 v1(2627,3031) 2627,2078 2630,2075 ; v1(2630,2561) 2630,2075 ; P2.1 2680,2025 2630,2075
W: P1.3 R15.1 | length 1859
  Top Layer w10: R15.1 v1(3215,2650) ; v1(3580,3306) P1.3
  Bottom Layer w10: v1(3215,2650) 3215,2678.91 3460.09,2924 3652,2924 3751,2825 3800,2825 3850,2875 3850,3036 v1(3580,3306)
pads on no net: AD1.4 AD2.4 ADA-A.5 ADA-A.6 ADA-A.7 ADA-B.1 ADA-B.2 ADA-B.3 C19.1 C24.1
copper on no net:
  other v2: 1200,2025 4350,2025 1200,3725 4350,3725

## Polygon pours and split planes (outlines as drawn)
no net on Top Layer "Mechanical 1-No Net" (solid, pour order 4): 4550,3925 4550,1825 1000,1825 1000,3925
no net on Bottom Layer "Mechanical 1-No Net" (solid, pour order 6): 1000,3925 1000,1825 4550,1825 4550,3925

## Keep-outs
Keep-Out Layer:
  the board outline again, w10

## Silkscreen, mask and mechanical layers (free items; w line width, h text height)
Top Overlay:
  text "A/D2" at 3895,3690 h60
  text "U" at 3350,3650 h60 r270
  text "V" at 3450,3650 h60 r270
  text "W" at 3550,3650 h60 r270
  text "A/D1" at 3895,3590 h60
  text "MPV" at 3510,3415 h60
  text "MPU" at 3510,3315 h60
  text "PWM3-1" at 3960,2995 h60 r90
  text "PWM2-1" at 4060,2995 h60 r90
  text "PWM1-1" at 4160,2995 h60 r90
  text "PWM1-2" at 4165,2425 h60 r90
  text "PWM3-2" at 3960,2415 h60 r90
  text "PWM2-2" at 4060,2415 h60 r90
  text "GND" at 3775,2200 h60
  text "GND" at 3445,2195 h60
  text "V12" at 3445,2095 h60
  text "AC5V" at 3775,2095 h60
  text "V48" at 3445,1995 h60
  text "V2.048" at 3775,1985 h60

## Text inside footprints (layer, text, board x,y; h text height)
P3: Top Overlay "6" at 3870,2845 h50 r180; Top Overlay "5" at 3870,2945 h50 r180; Top Overlay "2" at 4230,2845 h50 r180; Top Overlay "1" at 4210,2945 h50 r180